# Altium PCB canDrive_hw_board1_v2.PcbDoc
Units mm, origin at the board's own origin, x right, y up, seen from the top; angles counter-clockwise.
Board outline 42.4 x 20.43 mm, 2 copper layers (Top Layer, Bottom Layer), stack 1.571 mm thick; 46 components, 45 nets, 202 pads, 32 vias.
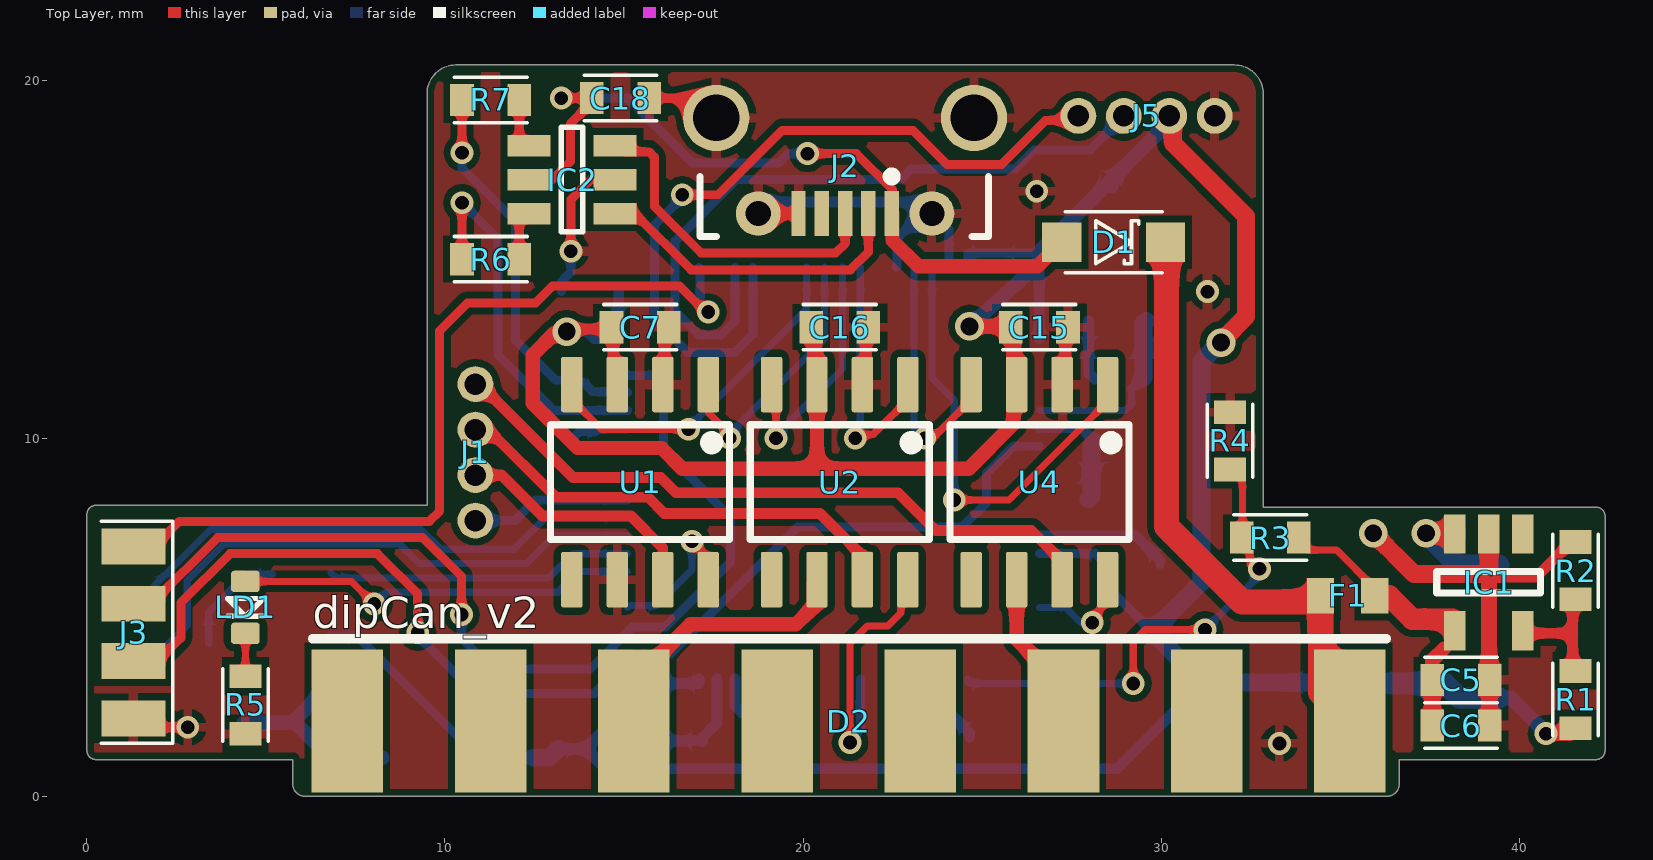
[diagram p0: Top Layer view]
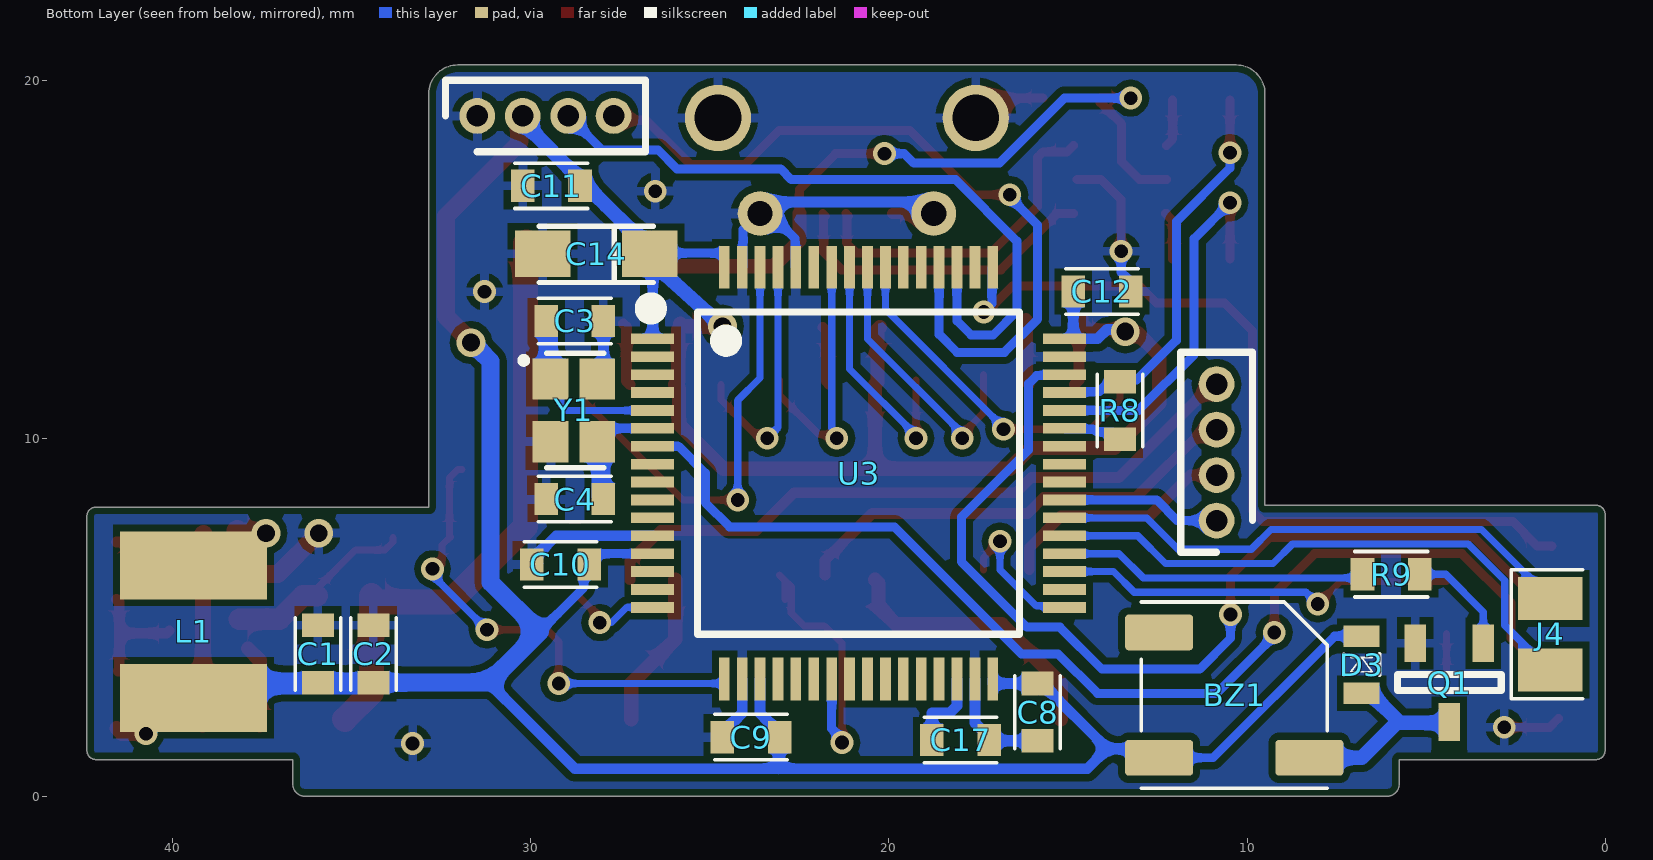
[diagram p1: Bottom Layer view, seen from below]
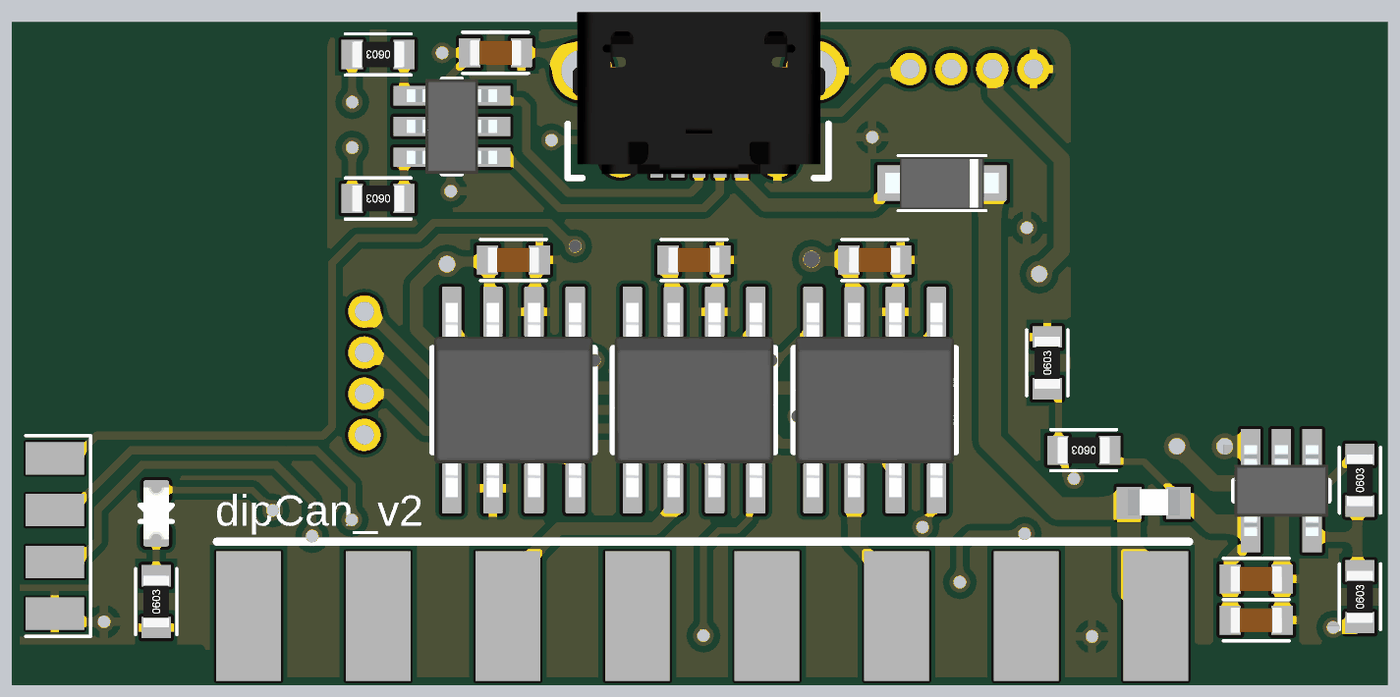
[diagram p2: 3D render of the assembled board from above, using the file's embedded part models]
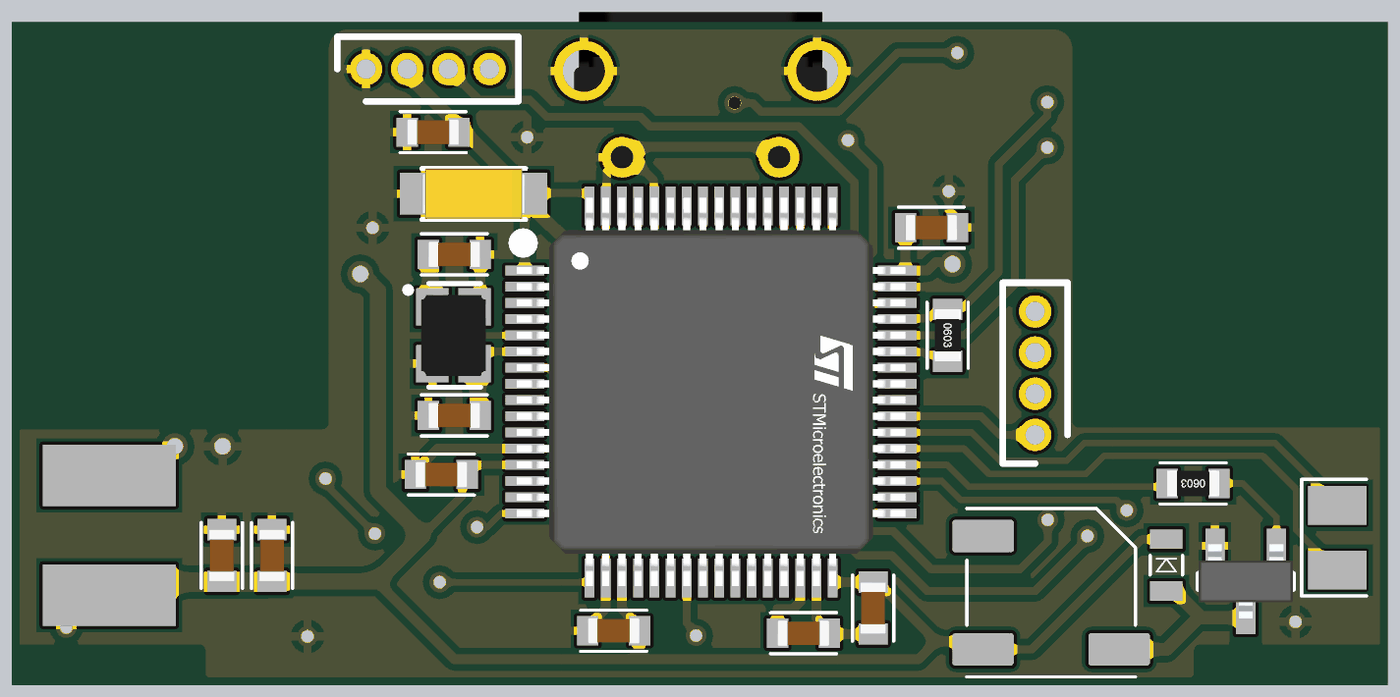
[diagram p3: 3D render of the assembled board from below, using the file's embedded part models]

## Layer stack, top to bottom
Top Solder: solder mask 0.0102, Solder Resist, Dk 3.5
Top Layer: signal copper 0.0356
Dielectric 1: dielectric 1.5, FR-4, Dk 4.8
Bottom Layer: signal copper 0.0356
Bottom Solder: solder mask 0.0102, Solder Resist, Dk 3.5

## Board outline
0.25,1.025 5.75,1.025 5.75,0.341 ccw(c6.091,0.341) 6.091,0 36.309,0 ccw(c36.309,0.341) 36.65,0.341 36.65,1.025 42.15,1.025 ccw(c42.15,1.275) 42.4,1.275 42.4,7.825 ccw(c42.15,7.825) 42.15,8.075 32.85,8.075 32.85,19.625 ccw(c32.05,19.625) 32.05,20.425 10.3,20.425 ccw(c10.3,19.625) 9.5,19.625 9.5,8.125 0.25,8.125 ccw(c0.25,7.875) 0,7.875 0,1.275 ccw(c0.25,1.275)

## Design rules (kind name [scope] priority, off if disabled: settings)
BoardOutlineClearance [All] p1: gap=0.2 ignorepadtopadclearanceinfootprint=FALSE except(0.4: Arc-SplitBarrior Arc-SplitContinuation Track-SplitBarrior Track-SplitContinuation SMDPad-SplitBarrior SMDPad-SplitContinuation THPad-SplitBarrior THPad-SplitContinuation Via-SplitBarrior Via-SplitContinuation Fill-SplitBarrior Fill-SplitContinuation Poly-SplitBarrior Poly-SplitContinuation Region-SplitBarrior Region-SplitContinuation Text-SplitBarrior Text-SplitContinuation)
Clearance "Clearance Bottom Layer" [OnLayer('Bottom Layer')] p1: gap=0.2 ignorepadtopadclearanceinfootprint=FALSE except(0: Arc-Hole Track-Hole SMDPad-Hole THPad-Hole Via-Hole Fill-Hole Poly-Hole Region-Hole Text-Hole)
Clearance "Clearance Top Layer" [OnLayer('Top Layer')] p2: gap=0.2 ignorepadtopadclearanceinfootprint=FALSE except(0: Arc-Hole Track-Hole SMDPad-Hole THPad-Hole Via-Hole Fill-Hole Poly-Hole Region-Hole Text-Hole)
Clearance [All] p3: gap=0.2 ignorepadtopadclearanceinfootprint=FALSE except(0: Arc-Hole Track-Hole SMDPad-Hole THPad-Hole Via-Hole Fill-Hole Poly-Hole Region-Hole Text-Hole; 0.089: Arc-Arc Arc-Track Arc-SMDPad Track-Track Track-SMDPad SMDPad-SMDPad; 0.127: Arc-Via Track-Via SMDPad-Via THPad-Via Via-Via; 0.254: Arc-Text Track-Text SMDPad-Text THPad-Text Via-Text Fill-Text Poly-Text Region-Text Text-Text)
HoleSize [All] p1: absolutevalues=TRUE maxlimit=6.3 minlimit=0.2 maxpercent=80.000 minpercent=20.000
MinimumAnnularRing [All] p1: minimumring=0.076
MinimumSolderMaskSliver [All] p1: minsoldermaskwidth=0.1
PolygonConnect [All] p1: connectstyle=Relief reliefconductorwidth=0.254 reliefentries=4 polygonreliefangle="90 Angle" airgapwidth=0.2
RoutingCorners [All] p1: cornerstyle=Round minsetback=2.54 maxsetback=2.54
RoutingVias [All] p1: holewidth=0.5 width=1 viastyle="Through Hole" minholewidth=0.2 minwidth=0.45 maxholewidth=1 maxwidth=2
SilkToSilkClearance [All] p1: silktosilkclearance=0.1
SilkToSolderMaskClearance [IsPad] p1: minsilkscreentomaskgap=0.1 clearancetoexposedcopper=TRUE
SolderMaskExpansion [All] p1: expansion=0.102 istentingtop=FALSE
Width [All] p1: maxlimit=2.54 minlimit=0.089 preferedwidth=0.381
25 further rules are at their usual default settings.

## Components (designator, comment, footprint, x,y, rotation, side; value= is the part's Value field where it differs from the comment)
BZ1 "Buzzer" 52X52_BUZZER 10.357,2.825 r180 bottom
C1 "Capacitor" C0603 35.95,3.975 r270 bottom
C2 "Capacitor" C0603 34.4,3.975 r270 bottom
C3 "Capacitor" C0603 28.775,13.275 r0 bottom
C4 "Capacitor" C0603 28.775,8.3 r180 bottom
C5 "Capacitor" C0603 38.375,3.25 r180 top
C6 "Capacitor" C0603 38.375,1.975 r180 top
C7 "Capacitor" C0603 15.45,13.1 r180 top
C8 "Capacitor" C0603 15.85,2.35 r90 bottom
C9 "Capacitor" C0603 23.854,1.65 r180 bottom
C10 "Capacitor" C0603 29.175,6.475 r180 bottom
C11 "Capacitor" C0603 29.43,17.05 r180 bottom
C12 "Capacitor" C0603 14.05,14.1 r0 bottom
C14 "Capacitor_polarized" CAP3216X180N_POLAR 28.175,15.15 r0 bottom
C15 "Capacitor" C0603 26.6,13.1 r180 top
C16 "Capacitor" C0603 21.025,13.1 r180 top
C17 "Capacitor" C0603 18,1.575 r0 bottom
C18 "Capacitor" C0603 14.9,19.5 r180 top
D1 "PMEG4005EH,115" SODFL3516X120N 28.675,15.475 r180 top
D2 "OBD_connector9-16" OBD9-16 6.2,0.1 r0 top locked
D3 "Diode" CD0603S01575 6.8,3.675 r270 bottom
F1 "Fuse" "FUSE 0603" 34.45,5.6 r0 top
IC1 "TPS560200DBVR" SOT95P280X145-5N 39.15,5.975 r270 top
IC2 "USBLC6-2SC6" SOT95P280X145-6N 13.55,17.225 r180 top
J1 "CON_1x4" 127MM_HEADER_4PIN 10.85,7.7 r90 top
J2 "micro_usb_female" MICRO_USB 21.175,21.075 r0 top
J3 "CON_1x4" RIBBON4PIN 1.3,4.575 r270 top
J4 "CON_1x2" RIBBON2PIN 1.525,4.525 r90 bottom
J5 "CON_1x4" 127MM_HEADER_4PIN 31.5,19 r180 top locked
L1 "Inductor" INDUCTOR 39.425,4.65 r270 bottom
LD1 "LED" LED_0603 4.425,5.275 r180 top
Q1 "NPN Transistor" SOT95P230X110-3N 4.35,3.175 r270 bottom
R1 "Resistor" R0603 41.575,2.7 r90 top
R2 "Resistor" R0603 41.575,6.3 r90 top
R3 "Resistor" R0603 33.05,7.225 r180 top
R4 "Resistor" R0603 31.925,9.925 r90 top
R5 "Resistor" R0603 4.425,2.55 r90 top
R6 "Resistor" R0603 11.275,15 r180 top
R7 "Resistor" R0603 11.275,19.45 r180 top
R8 "Resistor" R0603 13.55,10.775 r270 bottom
R9 "Resistor" R0603 5.975,6.2 r0 bottom
U1 "SN65HVD230D" SN65HVD230D_N 15.45,8.775 r270 top
U2 "SN65HVD230D" SN65HVD230D_N 21.025,8.775 r270 top
U3 "STM32F413RGT6" STM32F413RGT6_LQFP64_MFG 20.85,9.025 r180 bottom locked
U4 "SN65HVD230D" SN65HVD230D_N 26.6,8.775 r270 top
Y1 "OSC_16MHZ_25x20" 25X20_OSC 28.8,10.775 r270 bottom

## Footprints (in the part's own frame and the unit in brackets; to place one, negate y for a bottom-side part, rotate by r counter-clockwise, add the part's x,y. Pads: shape width x height; smd on the part's side, far side on the other; paste and mask are expansions set on the pad)
25X20_OSC [mm]
  rect 1.15x1 smd paste+0: 1(-0.875,-0.65) 2(0.875,-0.65) 3(0.875,0.65) 4(-0.875,0.65)
  silkscreen extent -1.6,-1.48 1.6,0.84, body extent -1.25,-1 1.25,1, height 0.52
52X52_BUZZER [mm]
  rrect20% 1.9x1 smd: 0(-2.1,-1.75) 1(2.1,-1.75) 2(-2.1,1.75)
  silkscreen extent -2.6,-2.6 2.6,2.6, body extent -2.6,-2.6 2.6,2.6, height 2
127MM_HEADER_4PIN [mm]
  round 1 hole 0.6: 1(0,0) 2(1.27,0) 3(2.54,0) 4(3.81,0)
C0603 [mm] "Imperial 0603"
  rect 0.66x0.9 smd: 0(-0.8,0) 1(0.8,0)
  silkscreen extent -1.02,-0.64 1.02,0.64, body extent -0.8,-0.4 0.8,0.4, height 0.78
CAP3216X180N_POLAR [mm]
  rect 1.55x1.3 smd: 1(-1.5,0) 2(1.5,0)
  silkscreen extent -1.6,-0.77 1.6,0.8, body extent -1.6,-0.77 1.6,0.77, height 1.8
CD0603S01575 [mm]
  rect 0.6x1 smd: 1(-0.8,0) 2(0.8,0)
  silkscreen extent -0.3,-0.5 0.3,0.5
"FUSE 0603" [mm]
  rect 0.76x1 smd: 1(0,0) 2(1.52,0)
  body extent -0.04,-0.38 1.56,0.42, height 0.8
INDUCTOR [mm]
  rect 1.9x4.1 smd: 1(-1.8,0) 2(1.9,0)
  body extent -2.45,-2.32 2.45,2.53, height 4
LED_0603 [mm]
  rrect30% 0.8x0.6 smd: A(0,-0.725) C(0,0.725)
  silkscreen extent -0.5,-0.25 0.5,0.25, body extent -0.4,-0.8 0.4,0.8, height 0.7
MICRO_USB [mm]
  round 1.85 hole 1.3: 0(-3.6,-2.13) 0(3.6,-2.13)
  round 1.25 hole 0.7: 0(-2.425,-4.8) 0(2.425,-4.8)
  rect 0.4x1.25 smd: 1(1.3,-4.8) 2(0.65,-4.8) 4(-0.65,-4.8) 5(-1.3,-4.8)
  rect 0.4x1.25 smd paste+0: 3(0,-4.8)
  silkscreen extent -4.05,-5.44 4,-3.64, body extent -3.9,-5.32 3.9,-0.32, height 2.68
OBD9-16 [mm]
  rect 2x4 smd mask+0.07: 9(1.075,2) 10(5.075,2) 11(9.075,2) 12(13.075,2) 13(17.075,2) 14(21.075,2) 15(25.075,2) 16(29.075,2)
  silkscreen extent 0.1,4.3 30.1,4.3
R0603 [mm] "Imperial 0603"
  rect 0.66x0.9 smd: 0(-0.8,0) 1(0.8,0)
  silkscreen extent -1.02,-0.64 1.02,0.64, body extent -0.8,-0.4 0.8,0.4, height 0.44
RIBBON2PIN [mm]
  rect 1.2x1.8 smd paste+0 mask+0.07: 1(-1,0) 2(1,0)
  silkscreen extent -1.8,-0.9 1.8,1.1
RIBBON4PIN [mm]
  rect 1x1.8 smd paste+0 mask+0.07: 1(-2.4,0) 2(-0.8,0) 3(0.8,0) 4(2.4,0)
  silkscreen extent -3.1,-0.9 3.1,1.1
SN65HVD230D_N [mm] "SOIC, 8-Leads, Body 5x4mm, Pitch 1.27mm, IPC Medium Density"
  rrect17% 1.55x0.6 smd: 1(-2.725,1.905) 2(-2.725,0.635) 3(-2.725,-0.635) 4(-2.725,-1.905) 5(2.725,-1.905) 6(2.725,-0.635) 7(2.725,0.635) 8(2.725,1.905)
  silkscreen extent -1.6,-2.5 1.6,2.5, body extent -3,-2.45 3,2.45, height 1.63
SODFL3516X120N [mm]
  rect 1.1x1.1 smd: 1(-1.45,0) 2(1.45,0)
  silkscreen extent -1.35,-0.85 1.35,0.85, body extent -1.75,-0.8 1.75,0.8, height 1.2
SOT95P230X110-3N [mm]
  rect 1.05x0.6 smd: 1(-1.1,0.95) 2(-1.1,-0.95) 3(1.1,0)
  silkscreen extent -0.23,-1.45 0.23,1.45, body extent -1.15,-1.45 1.15,1.45, height 1.1
SOT95P280X145-5N [mm]
  rect 1.1x0.6 smd: 1(-1.35,0.95) 2(-1.35,0) 3(-1.35,-0.95) 4(1.35,-0.95) 5(1.35,0.95)
  silkscreen extent -0.3,-1.45 0.3,1.45, body extent -1.4,-1.45 1.4,1.45, height 1.45
SOT95P280X145-6N [mm]
  rect 1.2x0.6 smd: 1(-1.2,0.95) 2(-1.2,0) 3(-1.2,-0.95) 4(1.2,-0.95) 5(1.2,0) 6(1.2,0.95)
  silkscreen extent -0.3,-1.46 0.3,1.46, body extent -1.4,-1.46 1.4,1.46, height 1.45
STM32F413RGT6_LQFP64_MFG [mm]
  rect 1.2x0.3 smd paste+0: 1(-5.75,3.75) 2(-5.75,3.25) 3(-5.75,2.75) 4(-5.75,2.25) 5(-5.75,1.75) 6(-5.75,1.25) 7(-5.75,0.75) 8(-5.75,0.25) 9(-5.75,-0.25) 10(-5.75,-0.75) 11(-5.75,-1.25) 12(-5.75,-1.75) 13(-5.75,-2.25) 14(-5.75,-2.75) 15(-5.75,-3.25) 16(-5.75,-3.75) 33(5.75,-3.75) 34(5.75,-3.25) 35(5.75,-2.75) 36(5.75,-2.25) 37(5.75,-1.75) 38(5.75,-1.25) 39(5.75,-0.75) 40(5.75,-0.25) 41(5.75,0.25) 42(5.75,0.75) 43(5.75,1.25) 44(5.75,1.75) 45(5.75,2.25) 46(5.75,2.75) 47(5.75,3.25) 48(5.75,3.75)
  rect 0.3x1.2 smd paste+0: 17(-3.75,-5.75) 18(-3.25,-5.75) 19(-2.75,-5.75) 20(-2.25,-5.75) 21(-1.75,-5.75) 22(-1.25,-5.75) 23(-0.75,-5.75) 24(-0.25,-5.75) 25(0.25,-5.75) 26(0.75,-5.75) 27(1.25,-5.75) 28(1.75,-5.75) 29(2.25,-5.75) 30(2.75,-5.75) 31(3.25,-5.75) 32(3.75,-5.75) 49(3.75,5.75) 50(3.25,5.75) 51(2.75,5.75) 52(2.25,5.75) 53(1.75,5.75) 54(1.25,5.75) 55(0.75,5.75) 56(0.25,5.75) 57(-0.25,5.75) 58(-0.75,5.75) 59(-1.25,5.75) 60(-1.75,5.75) 61(-2.25,5.75) 62(-2.75,5.75) 63(-3.25,5.75) 64(-3.75,5.75)
  silkscreen extent -6,-4.5 4.5,4.8, body extent -6,-6 6,6, height 1.6

## Part data
C14: "Capacitor"
D1: "Schottky Diode"
D2: library part OBD9-16
IC1 IC2: "Integrated Circuit"
J1 J3 J4 J5: "1x4 connector"
Q1: "Transistor BJT NPN"
U1 U2 U4: "CAN Bus Transceiver, 3.3 V, -40 to 85 degC, 8-Pin SOIC (D), Green (RoHS & no Sb/Br), Tube"
U3: library part CMP-0243-00023-3, "ARM Cortex-M4 32-bit MCU+FPU, 210 DMIPS, 1024 kB Flash, 192 kB Internal RAM, 51 I/Os, 64-pin LQFP, -40 to 85 degC, Tray"

## Via types
v1: diameter 0.635, hole 0.381, Top Layer to Bottom Layer, tented both sides, 27 vias
v2: diameter 0.8, hole 0.5, Top Layer to Bottom Layer, tented both sides, 5 vias

## Nets (pads, with @x,y where several pads share a name; then routed paths per layer and width w, separated by ;. In a path a pad name is that pad's centre, name@x,y a point inside that pad or via, vN(x,y) a via of type N, cw(c..) or ccw(c..) an arc to the next point about the centre after c; other vN are vias at no path point)
+3V3: BZ1.0 C1.1 C2.1 C7.1 C8.1 C9.1 C10.1 C11.1 C12.1 C14.1 C15.1 C16.1 D3.1 J5.2 L1.2 R1.0 U1.3 U2.3 U3.1 U3.13 U3.19 U3.32 U3.48 U3.64 U4.3 | length 112.4
  Top Layer w0.3: v2(13.4,12.975) 13.464,13.039 13.739,13.039 13.75,13.05 14.395,13.05 14.575,13.23 14.575,13.35 14.695,13.23 14.695,11.62 U1.3
  Top Layer w0.4: v2(13.4,12.975) 13.355,12.93 13.055,12.93 12.45,12.325 12.45,10.975 13.7,9.725 16.05,9.725 16.625,9.15 20.39,9.15 ; C16.1@20.25,13.1 20.32,13.03 20.32,11.57 U2.3 20.39,9.15 ; v2(24.65,13.125) 25.75,13.125 C15.1@25.825,13.2 ; C15.1@25.8,13.125 25.882,13.043 25.882,11.583 U4.3 25.865,11.4 25.865,10.39 24.625,9.15 20.39,9.15 ; v1(40.75,1.75) 41.425,1.75 R1.0
  Top Layer w0.5: J5.2 30.326,18.904 30.326,18.249 32.375,16.2 32.375,13.4 31.675,12.7 v2(31.675,12.669)
  Bottom Layer w0.25: D3.1 7.55,4.475 10.95,1.075 BZ1.0 ; U3.64 24.6,15.17 C14.1@26.58,15.17 ; U3.13 28.17,6.775 28.375,6.57 C10.1 28.525,6.325 28.525,5.825 29.75,4.6
  Bottom Layer w0.3: BZ1.0@13.157,1.325 13.905,1.325 ; v2(13.4,12.975) 13.464,13.039 13.909,13.039 14.173,12.775 14.85,12.775 C12.1 ; C8.1@15.73,3.15 13.905,1.325 ; C8.1 17.1,3.15 U3.32 ; C9.1 23.054,1.77 23.6,2.316 U3.19 ; C9.1@23.075,1.629 23.075,0.769 ; U3.1 C14.1@26.6,14.95 ; 31.175,3.175 28.769,0.769 23.075,0.769 ; 13.905,1.325 14.461,0.769 23.075,0.769
  Bottom Layer w0.4: v2(24.65,13.125) 25.95,14.3 26.6,14.95 C14.1@26.6,15.208 ; C14.1 26.617,15.208 C14.1@26.6,15.208 ; C11.1 C11.1@28.536,17.144 ; J5.2 30.23,18.838 C11.1@28.536,17.144 ; L1.2 39.775,2.75 40.75,1.775 v1(40.75,1.75) ; C14.1@26.6,15.208 C11.1@28.536,17.144
  Bottom Layer w0.5: BZ1.0 12.903,1.075 13.028,1.2 13.032,1.2 BZ1.0@13.157,1.325 ; C8.1@15.73,3.15 C8.1 ; C9.1 C9.1@23.075,1.629 ; v2(31.675,12.669) 31.644,12.669 31.125,12.15 31.125,5.975 29.75,4.6 31.175,3.175 C2.1
  Bottom Layer w0.6: C2.1 34.52,3.175 34.545,3.15 C1.1@35.95,3.15 ; C1.1 C1.1@35.95,3.15 ; L1.2 38.325,2.75 37.925,3.15 C1.1@35.95,3.15
+5V: C18.1 D1.2 IC2.5 J2.1 | length 21.6
  Top Layer w0.25: IC2.5@12.25,17.225 IC2.5 13,17.225 13.5,17.725 13.5,18.78 14.1,19.38 C18.1 v1(13.25,19.5) ; v1(20.125,17.95) 21.491,17.95 22.5,16.941 J2.1@22.5,16.275
  Top Layer w0.4: J2.1@22.5,16.275 22.5,15.525 23.225,14.8 26.55,14.8 D1.2
  Bottom Layer w0.25: v1(13.25,19.5) 15.1,19.5 16.919,17.681 19.306,17.681 19.575,17.95 v1(20.125,17.95)
+12V: D1.1 D2.16 F1.1 | length 17
  Top Layer w0.7: D1.1 30.155,15.445 30.155,7.533 32.263,5.425 34.275,5.425 F1.1 34.45,2.9 D2.16@35.2,2.15
BAT_MEAS: R3.1 R4.0 U3.17 | length 13.6
  Top Layer w0.2: v1(29.225,3.15) 29.225,4.325 29.55,4.65 v1(31.225,4.65) ; R4.0 32.045,9.125 32.275,8.895 R3.1@32.275,7.275 ; R3.1 32.25,7.25 32.48,7.02 32.48,6.47 32.6,6.35 v1(32.75,6.35)
  Bottom Layer w0.2: U3.17 24.6,3.2 24.65,3.15 v1(29.225,3.15) ; v1(31.225,4.65) 32.75,6.175 v1(32.75,6.35)
BUZZ: R9.1 U3.36 | length 8.6
  Bottom Layer w0.2: R9.1@6.813,6.238 6.951,6.1 12.9,6.1 13.575,6.775 U3.36
COMM_GPIO: J1.1 U3.39 | length 4.5
  Bottom Layer w0.25: J1.1 11.95,7.7 12.525,8.275 U3.39
COMM_RX: J5.4 U3.52 | length 21.8
  Top Layer w0.25: v1(16.625,16.8) 17.625,16.8 19.425,18.6 23.065,18.6 24.015,17.65 25.55,17.65 26.775,18.875 27.565,18.875 J5.4
  Bottom Layer w0.25: v1(16.625,16.8) 16.625,16.729 15.85,15.954 15.85,13.325 16.775,12.4 18.1,12.4 18.6,12.9 U3.52
COMM_TX: J5.3 U3.51 | length 19.6
  Top Layer w0.25: J5.3 J5.3@29.03,19
  Bottom Layer w0.25: U3.51 18.1,13.275 17.707,12.882 17.089,12.882 16.425,13.546 16.425,15.506 18.147,17.228 19.145,17.228 19.148,17.225 22.725,17.225 23.025,17.525 25.925,17.525 26.45,18.05 28.01,18.05 J5.3
GND: C1.0 C2.0 C3.0 C4.0 C5.0 C6.0 C7.0 C8.0 C9.0 C10.0 C11.0 C12.0 C14.2 C15.0 C16.0 C17.0 C18.0 IC1.2 IC2.2 J2.0 J2.5 J3.4 J5.1 Q1.2 R2.1 R4.1 R5.0 U1.2 U1.6 U2.2 U3.12 U3.18 U3.31 U3.47 U3.60 U3.63 U4.2 Y1.2 Y1.4 | length 46.1
  Top Layer w0.25: J3.4 1.549,1.926 v1(2.815,1.926) ; v1(13.516,15.225) 13.516,16.666 14.075,17.225 IC2.2 ; C18.0 17.02,19.5 J2.0@17.575,18.945
  Top Layer w0.3: U1.2 16.13,11.545 16.13,13.305 C7.0@16.175,13.35 ; J2.0@18.775,16.275 J2.5 J2.5@19.9,16.275 ; U2.2 21.755,11.595 21.755,13.005 C16.0@21.85,13.1 ; U4.2 27.33,11.595 27.33,13.105 C15.0@27.425,13.2 ; 39.162,6.125 40.48,6.125 41.455,7.1 R2.1
  Top Layer w0.4: C6.0 C5.0
  Top Layer w0.45: C5.0@39.162,3.263 39.162,6.125
  Top Layer w0.5: v2(35.925,7.347) 37.063,6.209 39.162,6.209 ; IC1.2 39.162,7.312 39.162,6.209 ; C5.0@39.162,3.263 C5.0 ; 39.162,6.125 39.162,6.209
  Bottom Layer w0.25: C12.0 13.25,14.375 13.516,14.641 v1(13.516,15.225) ; U3.60 22.625,14.8 22.625,15.584 J2.0@23.641,16.6 ; J2.0@23.6,16.275 23.625,16.275 24.075,15.825 24.075,14.8 U3.63 ; C10.0 C10.0@29.975,6.595
  Bottom Layer w0.3: C8.0 17.175,1.55 17.2,1.525 17.2,1.645 17.6,2.045 U3.31 ; J2.0@18.75,16.275 19.075,16.6 J2.0@23.641,16.6 ; J2.0@23.316,16.275 J2.0@23.6,16.275 ; U3.18 24.1,2.324 24.654,1.77 C9.0 ; U3.12 29.295,7.275 C10.0@29.975,6.595 ; C3.0 27.975,11.825 Y1.4
  other v1: 33.306,1.475 31.296,14.095 26.525,16.895
GPIO_1_TX: J4.1 U3.37 | length 16.6
  Bottom Layer w0.2: J4.1@1.225,3.45 1.475,3.45 2.8,4.775 2.8,6.025 3.825,7.05 8.725,7.05 9.275,6.5 12.275,6.5 13.05,7.275 U3.37
GPIO_2_RX: J4.2 U3.38 | length 15.3
  Bottom Layer w0.2: J4.2@1.225,5.45 1.45,5.45 3.45,7.45 9.331,7.45 9.881,6.9 11.925,6.9 12.8,7.775 U3.38
HS_CAN_H: J1.4 U4.7 | length 18.8
  Top Layer w0.3: J1.4@10.85,11.26 11.215,11.26 13.575,8.9 16.025,8.9 16.45,8.475 22.655,8.475 23.705,7.425 26.375,7.425 27.235,6.565 U4.7
HS_CAN_L: D2.14 U4.6 | length 4.4
  Top Layer w0.4: U4.6 25.965,4.385 27.2,3.15 D2.14@27.2,2.15
HS_CAN_RS: U3.16 U4.8 | length 3.2
  Top Layer w0.2: v1(28.075,4.85) 28.075,4.995 28.705,5.625 28.505,5.825 U4.8
  Bottom Layer w0.2: U3.16 27.327,5.275 27.752,4.85 v1(28.075,4.85)
HS_CAN_RX: U3.61 U4.4 | length 7.1
  Top Layer w0.2: v1(23.4,10) 23.62,10 24.695,11.075 U4.4
  Bottom Layer w0.2: U3.61 23.1,10.3 v1(23.4,10)
HS_CAN_TX: U3.62 U4.1 | length 12.7
  Top Layer w0.2: v1(24.225,8.275) 25.755,8.275 28.505,11.025 U4.1
  Bottom Layer w0.2: U3.62 23.6,11.683 24.225,11.058 v1(24.225,8.275)
LED1: LD1.A U3.35 | length 11.3
  Top Layer w0.2: LD1.A 7.392,6 v1(8.023,5.368)
  Bottom Layer w0.2: v1(8.023,5.368) 8.35,5.696 13.149,5.696 13.728,6.275 U3.35
LS_CAN_H: J1.2 U1.7 | length 6.8
  Top Layer w0.3: J1.2@10.85,8.72 11.1,8.97 11.58,8.97 12.725,7.825 15.193,7.825 16.085,6.933 U1.7@16.085,6.325
LS_CAN_RS: U1.8 U3.33 | length 4
  Top Layer w0.2: v1(16.9,7.125) 17.355,6.67 U1.8@17.355,6.325
  Bottom Layer w0.2: U3.33 15.15,5.325 15.9,5.325 16.9,6.325 v1(16.9,7.125)
LS_CAN_RX: U1.4 U3.55 | length 10.2
  Top Layer w0.2: U1.4@13.545,11.775 13.545,11.075 14.37,10.25 v1(16.8,10.25)
  Bottom Layer w0.2: v1(16.8,10.25) 16.8,10.3 20.1,13.6 U3.55
LS_CAN_TX: U1.1 U3.56 | length 7.6
  Top Layer w0.2: U1.1@17.355,11.775 17.355,10.72 v1@17.95,10.125
  Bottom Layer w0.2: v1@17.95,10.125 20.6,12.775 U3.56
  other v1: 17.95,10
MS_CAN_H: J1.3 U2.7 | length 13
  Top Layer w0.3: J1.3@10.85,9.99 11.1,10.24 11.21,10.24 13.1,8.35 15.675,8.35 16.125,7.9 20.475,7.9 21.785,6.59 U2.7@21.785,6.175
MS_CAN_L: D2.11 U2.6 | length 7.8
  Top Layer w0.4: D2.11@15.2,2.15 15.2,3.15 16.85,4.8 19.8,4.8 20.29,5.29 20.29,5.95 U2.6
MS_CAN_RS: U2.8 U3.23 | length 8.2
  Top Layer w0.2: v1(21.313,1.5) 21.313,4.273 21.796,4.756 22.368,4.756 22.73,5.118 22.73,5.85 U2.8 ; U2.8@22.9,5.5 22.9,6.02 U2.8@23.055,6.175
  Bottom Layer w0.25: v1(21.313,1.5) 21.313,1.604 21.6,1.891 U3.23
MS_CAN_RX: U2.4 U3.57 | length 7
  Top Layer w0.2: v1@19.245,10.08 U2.4@19.245,11.625
  Bottom Layer w0.2: v1@19.245,10.08 21.1,11.935 U3.57
  other v1: 19.245,10
MS_CAN_TX: U2.1 U3.58 | length 7.3
  Top Layer w0.2: v1@21.455,10.025 21.538,10.108 21.963,10.108 23.055,11.2 U2.1@23.055,11.625
  Bottom Layer w0.2: v1@21.455,10.025 21.455,10.143 21.6,10.288 U3.58
  other v1: 21.455,10
NetBZ1_1: BZ1.1 D3.2 Q1.3 | length 5.6
  Bottom Layer w0.4: Q1.3@4.375,2.05 5.82,2.05 6.795,1.075 BZ1.1 ; 5.82,2.145 6.55,2.875 D3.2
NetC17_1: C17.1 U3.30 | length 2.3
  Bottom Layer w0.3: U3.30 18.1,2.53 18.305,2.325 18.8,2.325 C17.1@18.8,1.525
NetIC1_3: IC1.3 L1.1 | length 3.4
  Top Layer w0.6: v2(37.4,7.347) 38.135,7.347 38.2,7.412 IC1.3 IC1.3@38.2,7.225
  Bottom Layer w0.6: v2(37.4,7.347) 38.297,6.45 L1.1
NetIC1_5: IC1.5 R1.1 R2.0 | length 3.5
  Top Layer w0.3: IC1.5 40.175,4.55 41.5,4.55 ; R1.1@41.525,3.5 41.5,3.525 41.5,4.55 ; R2.0 41.5,5.425 41.5,4.55
NetIC2_1: IC2.1 J2.2 | length 8.9
  Top Layer w0.25: IC2.1@14.85,16.275 15.3,16.275 16.875,14.7 21.325,14.7 21.825,15.2 J2.2@21.825,16.2 ; J2.2@21.775,16.2 J2.2@21.85,16.275
NetIC2_3: IC2.3 J2.3 | length 9.4
  Top Layer w0.25: IC2.3@14.85,18.175 15.025,18 15.7,18 15.85,17.85 15.85,16.475 17.15,15.175 20.914,15.175 21.175,15.436 J2.3@21.175,16.2 ; J2.3@21.125,16.2 J2.3@21.2,16.275
NetIC2_4: IC2.4 R7.0 | length 1.3
  Top Layer w0.25: R7.0 12.075,18.35 IC2.4@12.25,18.175
NetIC2_6: IC2.6 R6.0 | length 1.4
  Top Layer w0.25: R6.0 12.075,16.075 12.275,16.275 IC2.6@12.25,16.275
NetLD1_C: LD1.C R5.1 | length 1.2
  Top Layer w0.2: R5.1 LD1.C
NetQ1_1: Q1.1 R9.0 | length 3.1
  Bottom Layer w0.2: Q1.1 3.4,5.15 4.45,6.2 R9.0
OSC_IN: C3.1 U3.5 Y1.1 | length 5.1
  Bottom Layer w0.2: U3.5 29,10.775 29.175,10.95 Y1.1@29.175,11.375
  Bottom Layer w0.25: Y1.1@29.175,11.375 Y1.1
  Bottom Layer w0.5: Y1.1 29.513,11.712 29.513,13.213 C3.1
OSC_OUT: C4.1 U3.6 Y1.3 | length 3.4
  Bottom Layer w0.25: U3.6 27.775,10.275 Y1.3
  Bottom Layer w0.5: C4.1 28.055,8.38 28.055,9.805 Y1.3
ST_NRST: J3.3 U3.7 | length 32.7
  Top Layer w0.25: J3.3@1.659,3.934 1.5,3.775 1.975,3.775 2.625,4.425 2.625,5.4 4,6.775 8.113,6.775 9.238,5.65 v1(9.238,4.575)
  Bottom Layer w0.25: v1@9.238,4.487 10.85,2.875 14.175,2.875 15.279,3.979 16.304,3.979 19.85,7.525 24.45,7.525 25.125,8.2 25.125,9.025 25.875,9.775 U3.7
ST_SWCLK: J3.1 U3.49 | length 23.5
  Top Layer w0.25: J3.1@1.475,6.994 J3.1@1.519,6.994 ; J3.1@1.5,6.975 J3.1@1.519,6.994 ; v1(17.355,13.525) 17.275,13.525 16.55,14.25 12.999,14.25 12.524,13.775 10.625,13.775 9.85,13 9.85,7.964 9.561,7.675 2.583,7.675 1.902,6.994 J3.1@1.519,6.994
  Bottom Layer w0.25: U3.49 17.125,14.75 17.125,13.755 v1(17.355,13.525)
ST_SWDIO: J3.2 U3.46 | length 27.9
  Top Layer w0.25: J3.2@1.514,5.389 1.814,5.389 3.65,7.225 9.375,7.225 10.461,6.139 v1(10.461,5.075)
  Bottom Layer w0.25: v1(10.461,5.075) 10.461,4.413 11.324,3.55 14.05,3.55 15.225,4.725 16.15,4.725 17.975,6.55 17.975,7.798 16.1,9.673 16.1,11.525 15.875,11.75 15.125,11.75 U3.46
USB_DM: R6.1 U3.44 | length 10.5
  Top Layer w0.25: R6.1 v1(10.475,16.575)
  Bottom Layer w0.25: v1(10.475,16.575) 11.475,15.575 11.475,12.335 13.035,10.775 U3.44
USB_DP: R7.1 R8.0 U3.45 | length 11.1
  Top Layer w0.25: v1(10.475,17.975) R7.1
  Bottom Layer w0.25: v1(10.475,17.975) 10.475,17.55 11.975,16.05 11.975,12.732 13.088,11.619 13.506,11.619 R8.0 13.85,11.575 14.125,11.3 15.075,11.3 U3.45
USB_EN: R8.1 U3.43 | length 1.7
  Bottom Layer w0.25: R8.1 13.755,10.18 14.205,10.18 14.275,10.25 15.075,10.25 U3.43
VIN: C5.1 C6.1 F1.2 IC1.4 R3.0 | length 7.7
  Top Layer w0.2: R3.0 33.85,7.105 34.08,6.875 34.904,6.875 35.97,5.809 F1.2
  Top Layer w0.4: C6.1 C5.1 37.575,3.8 IC1.4@37.9,4.125
  Top Layer w0.6: F1.2 36.368,5.6 37.018,4.95 IC1.4@38.15,4.95
pads on no net: BZ1.2 D2.9 D2.10 D2.12 D2.13 D2.15 IC1.1 J2.4 U1.5 U2.5 U3.2 U3.3 U3.4 U3.8 U3.9 U3.10 U3.11 U3.14 U3.15 U3.20 U3.21 U3.22 U3.24 U3.25 U3.26 U3.27 U3.28 U3.29 U3.34 U3.40 U3.41 U3.42 U3.50 U3.53 U3.54 U3.59 U4.5

## Polygon pours and split planes (outlines as drawn)
GND on Bottom Layer "GND_L02_P000" (solid, pour order 0): 0.25,1.025 5.75,1.025 5.75,0.341 ccw(c6.091,0.341) 6.091,0 36.309,0 ccw(c36.309,0.341) 36.65,0.341 36.65,1.05 42.15,1.05 ccw(c42.162,1.287) 42.4,1.275 42.4,7.825 ccw(c42.15,7.825) 42.15,8.075 32.85,8.075 32.85,19.625 ccw(c32.05,19.625) 32.05,20.425 10.3,20.425 ccw(c10.3,19.625) 9.5,19.625 9.5,8.125 0.25,8.125 ccw(c0.25,7.875) 0,7.875 0,1.275 ccw(c0.25,1.275)
GND on Top Layer "GND_L01_P001" (solid, pour order 1): 0.25,1.025 5.75,1.025 5.75,0.341 ccw(c6.091,0.341) 6.091,0 36.309,0 ccw(c36.309,0.341) 36.65,0.341 36.65,1.05 39.4,1.05 42.15,1.05 ccw(c42.163,1.287) 42.4,1.275 42.4,7.825 ccw(c42.15,7.825) 42.15,8.075 32.85,8.075 32.85,19.625 ccw(c32.05,19.625) 32.05,20.425 10.3,20.425 ccw(c10.3,19.625) 9.5,19.625 9.5,8.125 0.25,8.125 ccw(c0.25,7.875) 0,7.875 0,1.275 ccw(c0.25,1.275)

## Silkscreen, mask and mechanical layers (free items; w line width, h text height)
Top Overlay:
  text "dipCan_v2" at 6.3,4.4 h1.52
Mechanical 1:
  lines w0.1: 0,7.869 0,1.294 ccw(c0.25,1.294) 0.25,1.044 5.75,1.044 5.75,0.36 ccw(c6.091,0.36) 6.091,0.019 36.309,0.019 ccw(c36.309,0.36) 36.65,0.36 36.65,1.044 42.15,1.044 ccw(c42.15,1.294) 42.4,1.294 42.4,7.844 ccw(c42.15,7.844) 42.15,8.094 32.85,8.094 32.85,19.644 ccw(c32.05,19.644) 32.05,20.444 10.3,20.444 ccw(c10.3,19.644) 9.5,19.644 9.5,8.144 9.4,8.144 0.275,8.144 ; 0,7.894 cw(c0.25,7.894) 0.25,8.144